# Altium PCB Control_board.PcbDoc
Units mil, origin at the board's own origin, x right, y up, seen from the top; angles counter-clockwise.
Board outline 2109.83 x 3321.85 mil, 2 copper layers (Top Layer, Bottom Layer), stack 62.192 mil thick; 4 components, 13 nets, 54 pads, 14 vias.
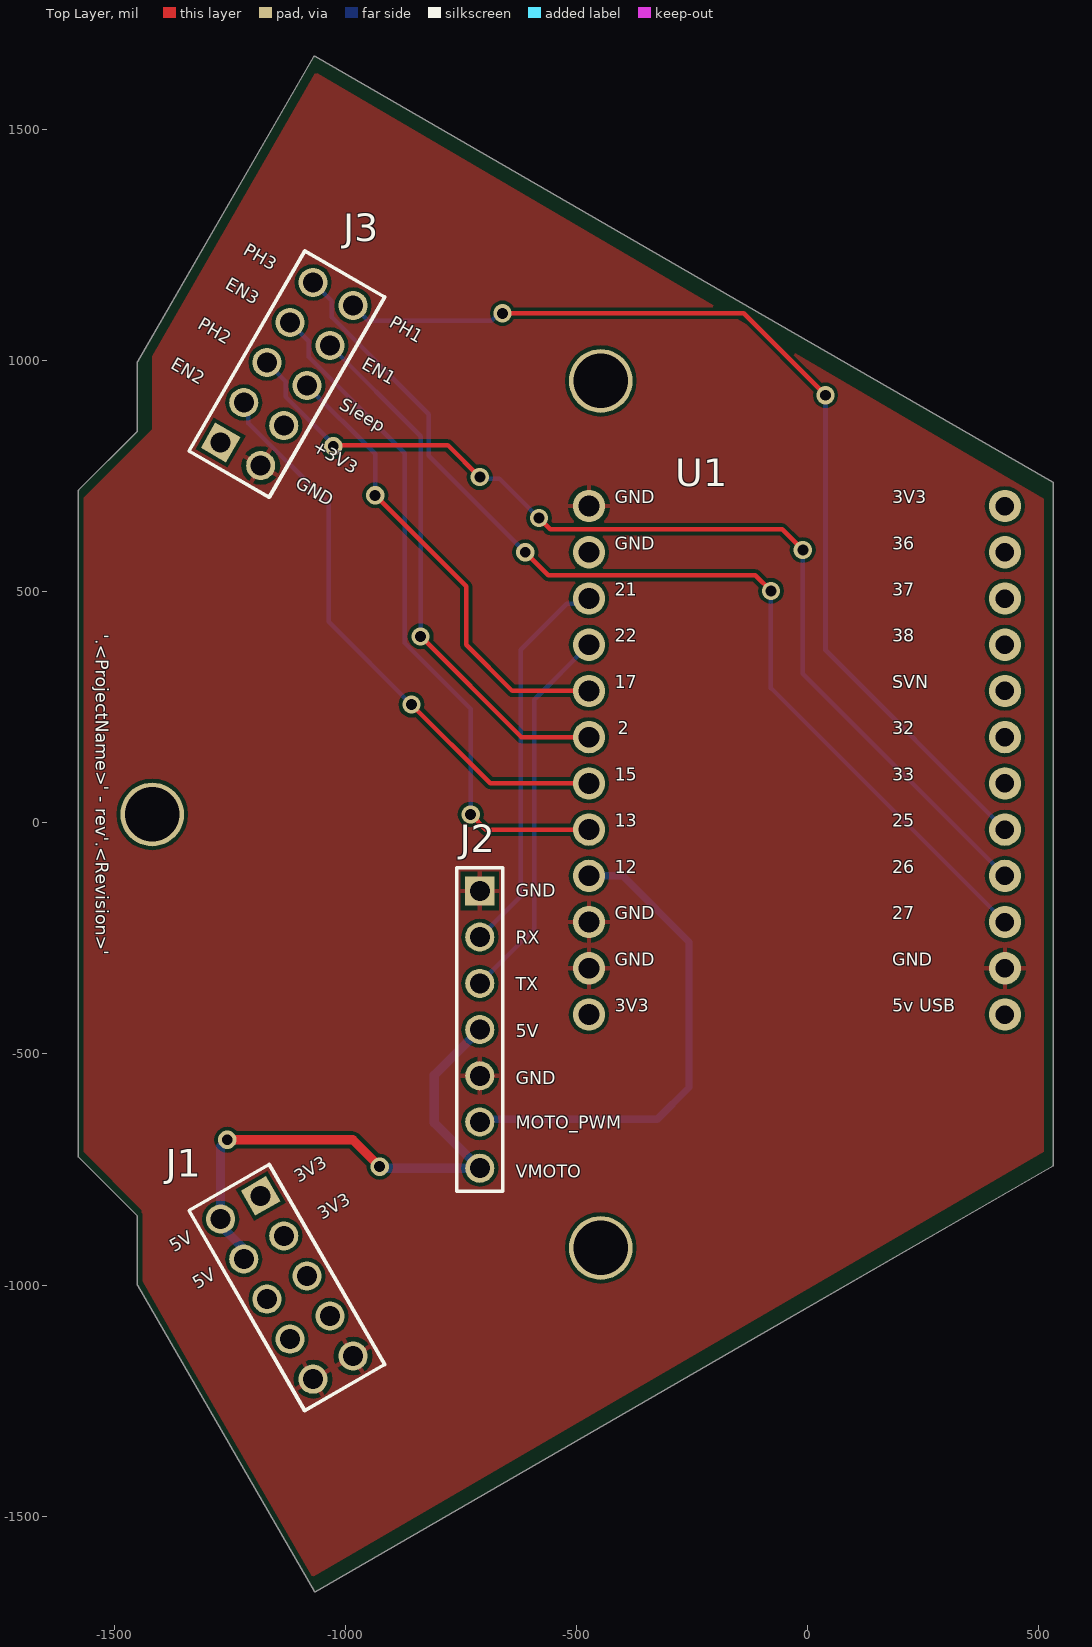
[diagram p0: Top Layer view]
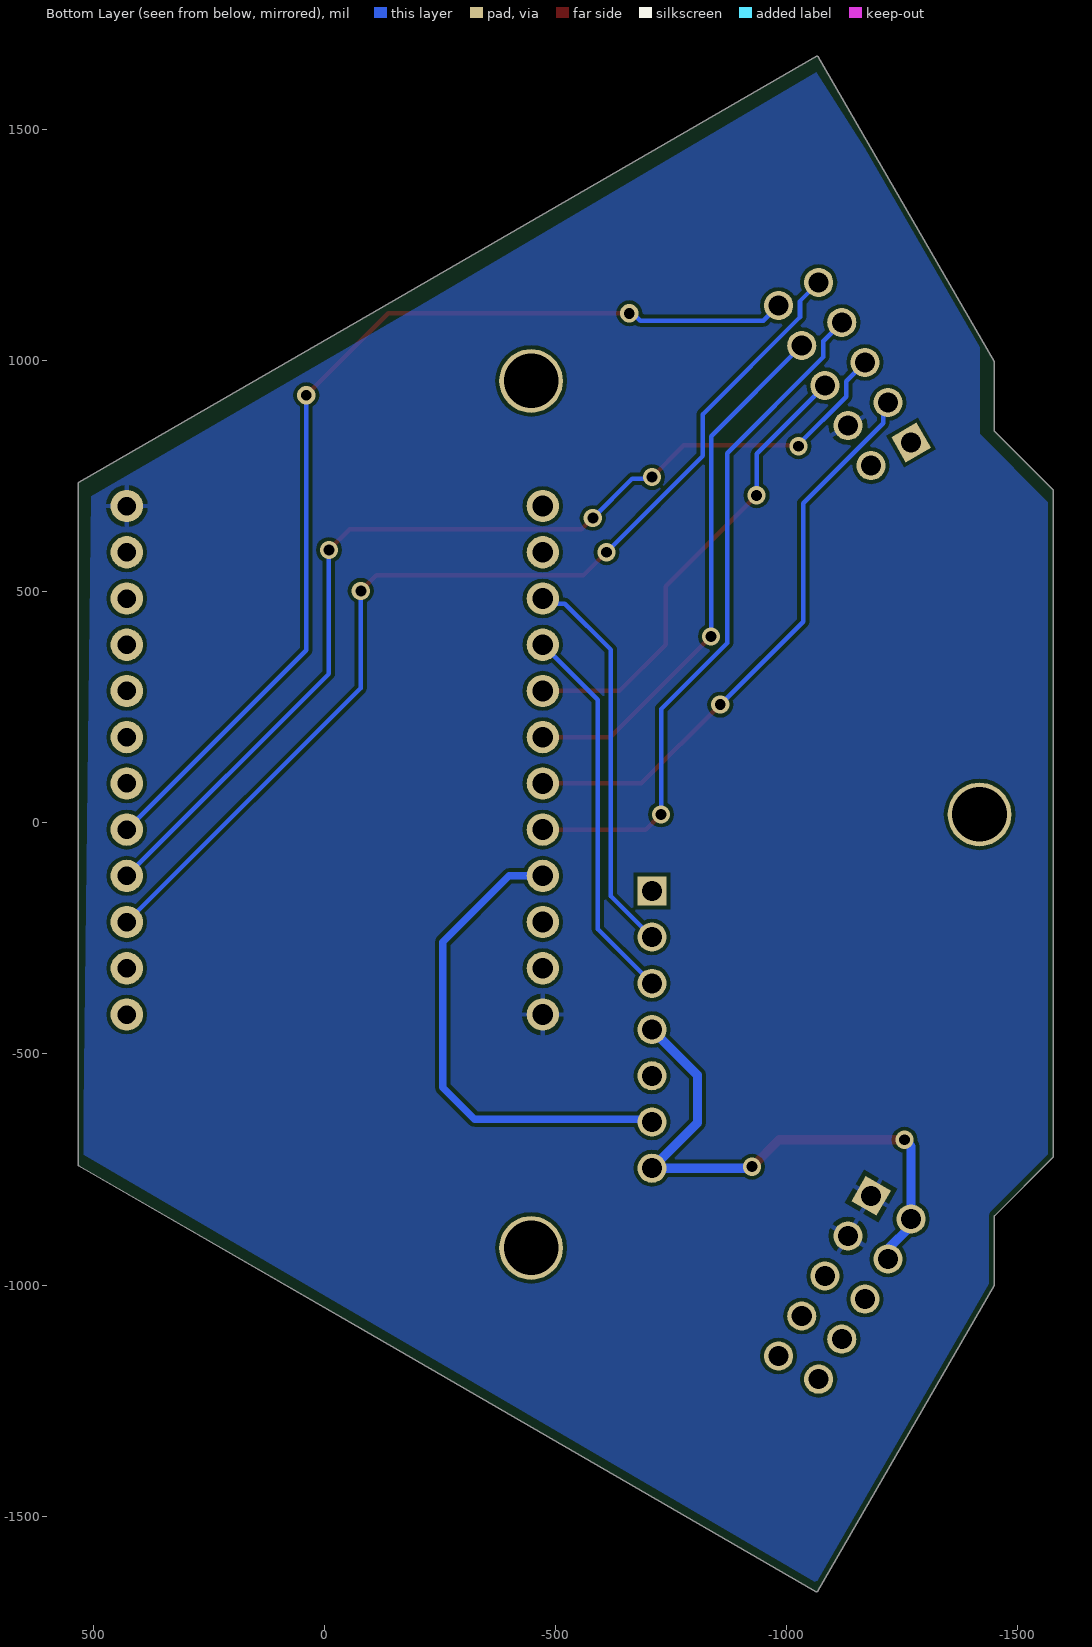
[diagram p1: Bottom Layer view, seen from below]
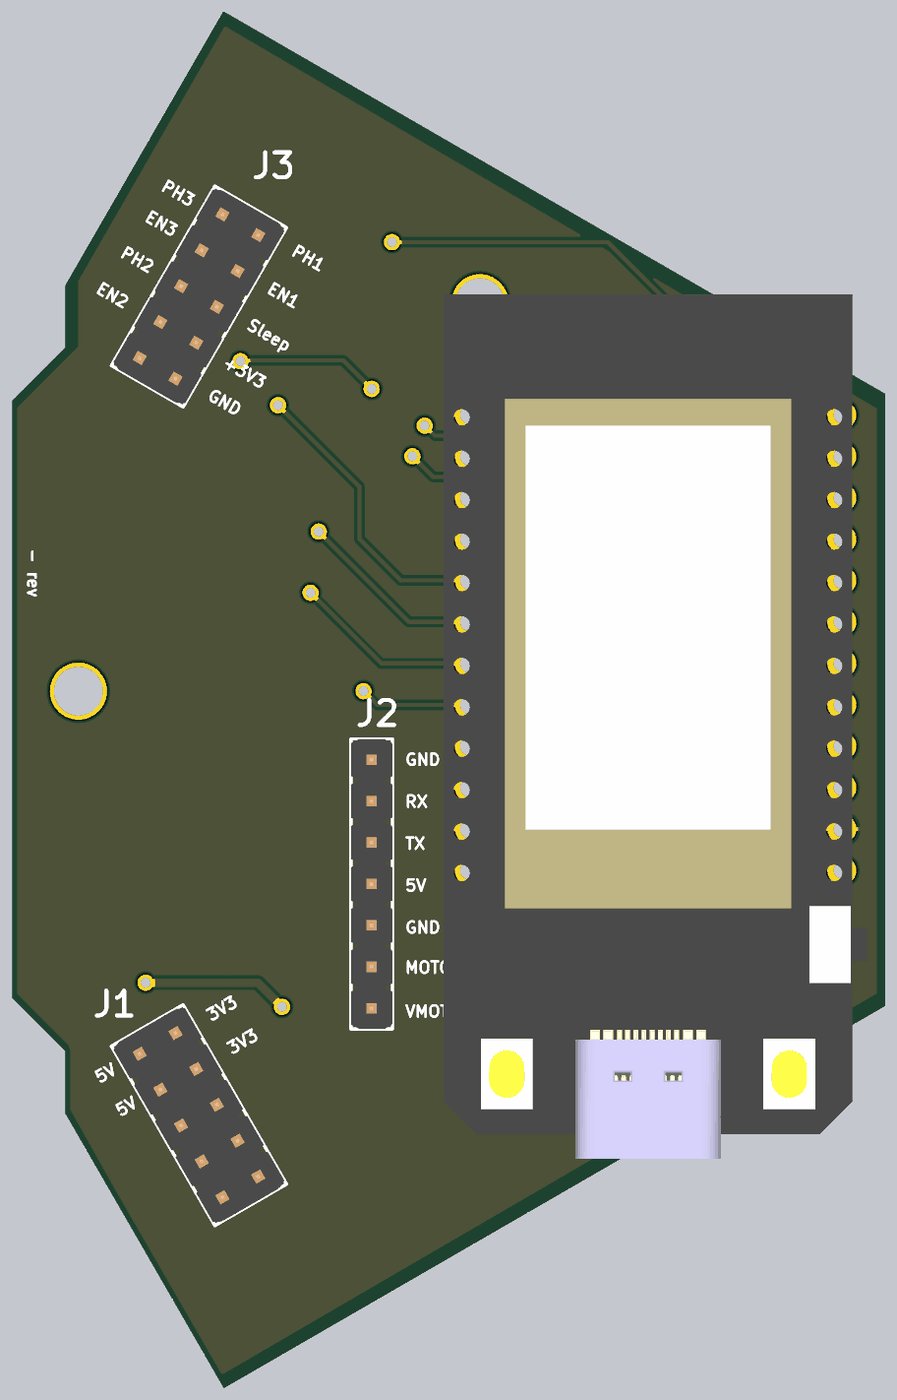
[diagram p2: 3D render of the assembled board from above, using the file's embedded part models]

## Layer stack, top to bottom
Top Solder: solder mask 0.4, Solder Resist, Dk 3.5
Top Layer: signal copper 1.4
Dielectric 1: dielectric 59.3921, FR-4, Dk 4.8
Bottom Layer: signal copper 1.4
Bottom Solder: solder mask 0.4, Solder Resist, Dk 3.5

## Board outline
-1576.58,-723 cw(c-1574.8,-721.22) -1577.32,-721.22 -1577.32,451.39 -1577.32,718.49 cw(c-1574.8,718.49) -1576.58,720.27 -1449.37,847.49 -1449.37,996.53 cw(c-1446.85,996.53) -1449.03,997.79 -1068.29,1657.26 cw(c-1066.12,1656) -1064.86,1658.18 -108.55,1106.06 531.26,736.66 cw(c530,734.48) 532.51,734.48 532.52,-740 cw(c530,-740) 531.26,-742.18 -83.19,-1096.93 -1063.65,-1663 cw(c-1064.91,-1660.82) -1067.09,-1662.08 -1449.03,-1000.52 cw(c-1446.85,-999.26) -1449.37,-999.26 -1449.37,-850.22

## Design rules (kind name [scope] priority, off if disabled: settings)
BoardOutlineClearance [All xor (OnLayer('Top Overlay') or OnLayer('Bottom Overlay'))] p1: gap=9.84 ignorepadtopadclearanceinfootprint=FALSE except(0: Arc-SplitContinuation Track-SplitContinuation SMDPad-SplitContinuation THPad-SplitContinuation Via-SplitContinuation Fill-SplitContinuation Poly-SplitContinuation Region-SplitContinuation Text-SplitContinuation; 11.81: Poly-OutlineEdge)
Clearance [All] p1: gap=7.87 ignorepadtopadclearanceinfootprint=TRUE except(0: Arc-Hole Track-Hole SMDPad-Text SMDPad-Hole THPad-Hole Via-Hole Fill-Hole Poly-Hole Region-Hole Text-Hole; 7.48: Arc-SMDPad Track-SMDPad SMDPad-SMDPad; 9.84: Arc-THPad Arc-Via Arc-Text Track-THPad Track-Via Track-Text SMDPad-THPad SMDPad-Via THPad-THPad THPad-Via THPad-Text Via-Via Via-Text Fill-Text Poly-Text Region-Text Text-Text)
ComponentClearance [All] p1: gap=0 collisioncheckmode=3 verticalgap=0 showdistances=FALSE
HoleSize [All] p1: absolutevalues=TRUE maxlimit=118.11 minlimit=1 maxpercent=80.000 minpercent=20.000
MinimumSolderMaskSliver [All] p1: minsoldermaskwidth=2.36
PolygonConnect [All] p1: connectstyle=Relief reliefconductorwidth=10 reliefentries=4 polygonreliefangle="90 Angle" airgapwidth=10
RoutingVias [All] p1: holewidth=35.43 width=59.06 viastyle="Through Hole" minholewidth=11.81 minwidth=23.62 maxholewidth=23.62 maxwidth=39.37
SilkToSilkClearance [All] p1: silktosilkclearance=1.18
SilkToSolderMaskClearance [IsPad] p1: minsilkscreentomaskgap=1 clearancetoexposedcopper=TRUE
SolderMaskExpansion [All] p1: expansion=4 istentingtop=FALSE
Width Width_Antenna [InNet('LNA_IN')] p1: maxlimit=125.98 minlimit=11.81 preferedwidth=47.24
Width Width_AC_Power [InNetClass('ACPowerNets')] p2: maxlimit=125.98 minlimit=19.68 preferedwidth=66.93
Width Width_DC_Power [InNetClass('DCPowerNets')] p3: maxlimit=39.37 minlimit=9.84 preferedwidth=19.68
Width [All] p4: maxlimit=23.62 minlimit=9.84 preferedwidth=15.75
25 further rules are at their usual default settings.

## Components (designator, comment, footprint, x,y, rotation, side; value= is the part's Value field where it differs from the comment)
J1 "10p" 61301021121 -1125.98,-1005.3 r300 top
J2 "07p" 61300711121 -708.66,-447.1 r270 top
J3 "10p" 61301021121 -1125.98,971.07 r60 top
U1 "TTGO T-display" ESP32-TTGO-TDISPLAY -472.44,-414.57 r0 top

## Footprints (in the part's own frame and the unit in brackets; to place one, negate y for a bottom-side part, rotate by r counter-clockwise, add the part's x,y. Pads: shape width x height; smd on the part's side, far side on the other; paste and mask are expansions set on the pad)
61300711121 [mm] "7 pins, 1 row, straight, gold plating"
  rect 1.6x1.6 hole 1.1: 1(-7.62,0)
  round 1.6 hole 1.1: 2(-5.08,0) 3(-2.54,0) 4(0,0) 5(2.54,0) 6(5.08,0) 7(7.62,0)
  silkscreen extent -8.89,-1.27 8.89,1.27, body extent -8.89,-1.27 8.89,1.27, height 8.57
61301021121 [mm] "10 pins, dual pin, straight, gold plating"
  rect 1.6x1.6 hole 1.1: 1(-5.08,1.27)
  round 1.6 hole 1.1: 2(-2.54,1.27) 3(0,1.27) 4(2.54,1.27) 5(5.08,1.27) 6(-5.08,-1.27) 7(-2.54,-1.27) 8(0,-1.27) 9(2.54,-1.27) 10(5.08,-1.27)
  silkscreen extent -6.35,-2.54 6.35,2.54, body extent -6.35,-2.54 6.35,2.54, height 8.57
ESP32-TTGO-TDISPLAY [mil]
  round 70 hole 45: 2(0,600) 3V3(0,0) 12(0,300) 13(0,400) 15(0,500) 17(0,700) 21(0,900) 22(0,800) GND1(0,1100) GND2(0,1000) GND3(0,200) GND4(0,100)
  round 70 hole 40: 3V3-(900,1100) 5V(900,0) 25(900,400) 26(900,300) 27(900,200) 32(900,600) 33(900,500) 37(900,900) 38(900,800) GND5(900,100) SVN(900,700) SVP(900,1000)
  body extent -62,-696 961,1391, height 531

## Part data
J1 J3: library part 61301021121, "WR-PHD 2.54 mm THT Dual Pin Header, 10p", Part Number=61301021121, Vendor="Wurth Elektronik"
J2: library part 61300711121, "WR-PHD 2.54 mm THT Pin Header, 07p", Part Number=61300711121, Vendor="Wurth Elektronik"

## Free pads (board coordinates)
  round 137.8 hole 118.11: ""(-1417.32,18.32) ""(-447.09,-919.56) ""(-447.09,956.19)

## Via types
v1: diameter 39.37, hole 23.62, Top Layer to Bottom Layer, 14 vias

## Nets (pads, with @x,y where several pads share a name; then routed paths per layer and width w, separated by ;. In a path a pad name is that pad's centre, name@x,y a point inside that pad or via, vN(x,y) a via of type N, cw(c..) or ccw(c..) an arc to the next point about the centre after c; other vN are vias at no path point)
+3V3: J1.1 J1.2 J3.7 U1.3V3 U1.3V3-
+5V: J1.6 J1.7 J2.4 J2.7 | length 1238.3
  Top Layer w19.68: v1(-1254.96,-685.46) -983.53,-685.46 v1(-925.2,-743.79)
  Bottom Layer w19.68: v1(-1254.96,-685.46) -1269.29,-699.79 J1.6 -1269.29,-871.4 -1219.29,-921.4 J1.7 ; v1(-925.2,-743.79) -921.89,-747.1 J2.7 -807.09,-648.68 -807.09,-545.53 J2.4
EN1: J3.9 U1.2 | length 1164.9
  Top Layer w9.84: v1(-836.61,403.54) -618.5,185.43 U1.2
  Bottom Layer w9.84: J3.9 -836.61,836.61 v1(-836.61,403.54)
EN2: J3.2 U1.15 | length 1258.4
  Top Layer w9.84: v1(-856.3,255.91) -685.83,85.43 U1.15
  Bottom Layer w9.84: J3.2 -1209.12,899.3 -1209.12,864.72 -1035.53,691.14 -1035.53,435.14 v1(-856.3,255.91)
EN3: J3.4 U1.13 | length 1495.8
  Top Layer w10: v1(-728.35,18.32) -695.46,-14.57 U1.13
  Bottom Layer w10: J3.4 -1079.02,1042.41 -1079.02,1007.95 -871.14,800.07 -871.14,389.24 -728.35,246.45 v1(-728.35,18.32)
GND: J1.5 J1.10 J2.1 J2.5 J3.6 U1.GND1 U1.GND3 U1.GND4 U1.GND5
Lidar_RX: J2.2 U1.21 | length 851.6
  Bottom Layer w9.84: J2.2 -619.92,-158.36 -619.92,374.18 -520.17,473.92 -483.95,473.92 U1.21
Lidar_TX: J2.3 U1.22 | length 830.4
  Bottom Layer w9.84: J2.3 -591.22,-229.66 -591.22,266.65 U1.22
PH1: J3.10 U1.25 | length 2216.2
  Top Layer w10: v1(-659.45,1102.36) -137.8,1102.36 v1(39.37,925.2)
  Bottom Layer w10: J3.10 -949.81,1086.4 -683.36,1086.4 -667.4,1102.36 v1(-659.45,1102.36) ; v1(39.37,925.2) 39.37,373.62 U1.25
PH2: J3.3 U1.26 | length 2237.5
  Top Layer w9.84: v1(-1025.72,814.83) -1023.62,816.93 -777.56,816.93 v1(-708.66,748.03) ; v1(-580.71,659.45) -580.49,659.45 -556.24,635.2 -54.49,635.2 v1(-9.84,590.55)
  Bottom Layer w9.84: J3.3 -1128.94,955.73 -1128.94,922.25 -1025.72,819.03 v1(-1025.72,814.83) ; v1(-708.66,748.03) -705.59,744.96 -666.22,744.96 v1(-580.71,659.45) ; v1(-9.84,590.55) -9.84,322.83 U1.26
PH3: J3.5 U1.27 | length 2266.3
  Top Layer w9.84: v1(-610.24,585.43) -560.47,535.67 -112.44,535.67 v1(-78.74,501.97)
  Bottom Layer w9.84: J3.5 -1028.94,1128.94 -1028.94,1094.36 -818.9,884.31 -818.9,794.09 v1(-610.24,585.43) ; v1(-78.74,501.97) -78.74,291.73 U1.27
PWM_Motor: J2.6 U1.12 | length 1074.1
  Bottom Layer w15.75: J2.6 -702.75,-641.19 -324.8,-641.19 -255.91,-572.3 -255.91,-257.81 -399.15,-114.57 U1.12
sleep: J3.8 U1.17 | length 1010.5
  Top Layer w9.84: v1(-935.04,708.66) -738.19,511.81 -738.19,385.43 -638.19,285.43 U1.17
  Bottom Layer w9.84: J3.8 -935.04,798.43 v1(-935.04,708.66)
pads on no net: J1.3 J1.4 J1.8 J1.9 J3.1 U1.5V U1.32 U1.33 U1.37 U1.38 U1.GND2 U1.SVN U1.SVP

## Polygon pours and split planes (outlines as drawn)
GND on Top Layer "GND" (solid, remove dead copper, pour order 0): -1567.87,701.06 -1417.32,851.61 -1417.32,1009.33 -1063.65,1624.02 511.81,701.06 511.81,-711.89 -1072.08,-1632.71 -1278.32,-1274.22 -1439.92,-986.77 -1439.92,-837.85 -1567.87,-708.74 -1567.87,-641 -1567.87,-635.88
+3V3 on Bottom Layer "GND" (solid, remove dead copper, pour order 2): -1580,679.09 -1417.32,841.77 -1417.32,1059.74 -1394.23,1102.76 -1376.52,1133.43 -1063.65,1624.02 -206.69,1119.28 504.33,706.3 521.65,-717.66 -1063.65,-1643.7 -1290.45,-1283.15 -1452.05,-995.7 -1452.05,-846.77 -1580,-717.66 -1580,-649.92 -1580,-644.81

## Silkscreen, mask and mechanical layers (free items; w line width, h text height)
Top Overlay:
  text "PH3" at -1222.05,1231.54 h27.56 r330
  text "EN3" at -1261.42,1157.61 h27.56 r330
  text "PH1" at -907.09,1074.97 h27.56 r330
  text "PH2" at -1320.48,1071 h27.56 r330
  text "EN2" at -1379.53,984.4 h27.56 r330
  text "EN1" at -966.15,984.4 h27.56 r330
  text "Sleep" at -1015.19,896.59 h27.56 r330
  text "+3V3" at -1073.28,805.72 h27.56 r330
  text "GND" at -1110.13,726.98 h27.56 r330
  text "'.<ProjectName>' - rev'.<Revision>'" at -1539.37,408.08 h27.56 r270
  text "GND" at -630.94,-160 h27.56
  text "RX" at -630.94,-261.29 h27.56
  text "TX" at -630.94,-362.57 h27.56
  text "5V" at -630.94,-463.86 h27.56
  text "GND" at -630.94,-565.14 h27.56
  text "MOTO_PWM" at -630.94,-661.84 h27.56
  text "VMOTO" at -630.94,-767.72 h27.56
  text "3V3" at -1100,-780 h27.56 r30
  text "3V3" at -1050,-860 h27.56 r30
  text "5V" at -1370,-930 h27.56 r30
  text "5V" at -1320,-1010.45 h27.56 r30
Outline:
  lines w5: -1446.85,846.44 -1446.85,996.53 ; -1446.85,846.44 -1446.85,996.53 ; -1446.85,846.44 -1574.8,718.49 -1574.8,451.39 -1574.8,-591.92 -1574.8,-721.22 -1446.85,-849.18 -1446.85,-999.26 -1064.91,-1660.82 -84.45,-1094.75 530,-740 530,734.48 -109.81,1103.88 -1066.12,1656 -1446.85,996.53
Mechanical 4:
  lines w10: -1413.39,700.79 -1338.58,700.79

## Text inside footprints (layer, text, board x,y; h text height)
U1: Top Overlay "3V3" at 183.46,691.34 h27.56; Top Overlay "36" at 183.46,591.34 h27.56; Top Overlay "37" at 183.46,491.34 h27.56; Top Overlay "38" at 183.46,391.34 h27.56; Top Overlay "SVN" at 183.46,291.34 h27.56; Top Overlay "32" at 183.46,191.34 h27.56; Top Overlay "33" at 183.46,91.34 h27.56; Top Overlay "25" at 183.46,-8.66 h27.56; Top Overlay "26" at 183.46,-108.66 h27.56; Top Overlay "27" at 183.46,-208.66 h27.56; Top Overlay "GND" at 183.46,-308.66 h27.56; Top Overlay "5v USB" at 183.46,-408.66 h27.56; Top Overlay "3V3" at -416.54,-408.66 h27.56; Top Overlay "GND" at -416.54,-308.66 h27.56; Top Overlay "GND" at -416.54,-208.66 h27.56; Top Overlay "12" at -416.54,-108.66 h27.56; Top Overlay "13" at -416.54,-8.66 h27.56; Top Overlay "15" at -416.54,91.34 h27.56; Top Overlay "2" at -410.63,191.34 h27.56; Top Overlay "17" at -416.54,291.34 h27.56; Top Overlay "22" at -416.54,391.34 h27.56; Top Overlay "21" at -416.54,491.34 h27.56; Top Overlay "GND" at -416.54,591.34 h27.56; Top Overlay "GND" at -416.54,691.34 h27.56; Mechanical 3 "By Jeffrey Gorissen" at -22.44,735.43 h18.6; Mechanical 3 "38" at 377.56,385.43 h18.6; Mechanical 3 "37" at 377.56,485.43 h18.6; Mechanical 3 "SVP" at 377.56,585.43 h18.6; Mechanical 3 "SVN" at 377.56,285.43 h18.6; Mechanical 3 "32" at 377.56,185.43 h18.6; Mechanical 3 "33" at 377.56,85.43 h18.6; Mechanical 3 "25" at 377.56,-14.57 h18.6; Mechanical 3 "26" at 377.56,-114.57 h18.6; Mechanical 3 "27" at 377.56,-214.57 h18.6; Mechanical 3 "5V" at 377.56,-414.57 h18.6; Mechanical 3 "12" at -422.44,-114.57 h18.6; Mechanical 3 "13" at -422.44,-14.57 h18.6; Mechanical 3 "15" at -422.44,85.43 h18.6; Mechanical 3 "2" at -422.44,185.43 h18.6; Mechanical 3 "17" at -422.44,285.43 h18.6; Mechanical 3 "22" at -422.44,385.43 h18.6; Mechanical 3 "21" at -422.44,485.43 h18.6; Mechanical 3 "3V3" at -422.44,-414.57 h18.6; Mechanical 3 "3V3" at 377.56,685.43 h18.6; Mechanical 3 "GND" at 377.56,-314.57 h18.6; Mechanical 3 "GND" at -422.44,-314.57 h18.6; Mechanical 3 "GND" at -422.44,-214.57 h18.6; Mechanical 3 "GND" at -422.44,585.43 h18.6; Mechanical 3 "GND" at -422.44,685.43 h18.6; Mechanical 3 "ESP32 TTGO" at -272.44,835.43 h89.9